# Altium PCB NBP-28 Rev 1.00.PCBDOC (part 3 of 6)
Units mil, origin at the board's own origin, x right, y up, seen from the top; angles counter-clockwise.
Board outline 2716.54 x 3917.15 mil, 8 copper layers (Top Layer, MidLayer3, MidLayer1, VCC, Gnd, VCCINT, MidLayer2, Bottom Layer), stack 59.043 mil thick; 229 components, 429 nets, 1584 pads, 1020 vias.
Unrouted connection lines stored in the file: 302.
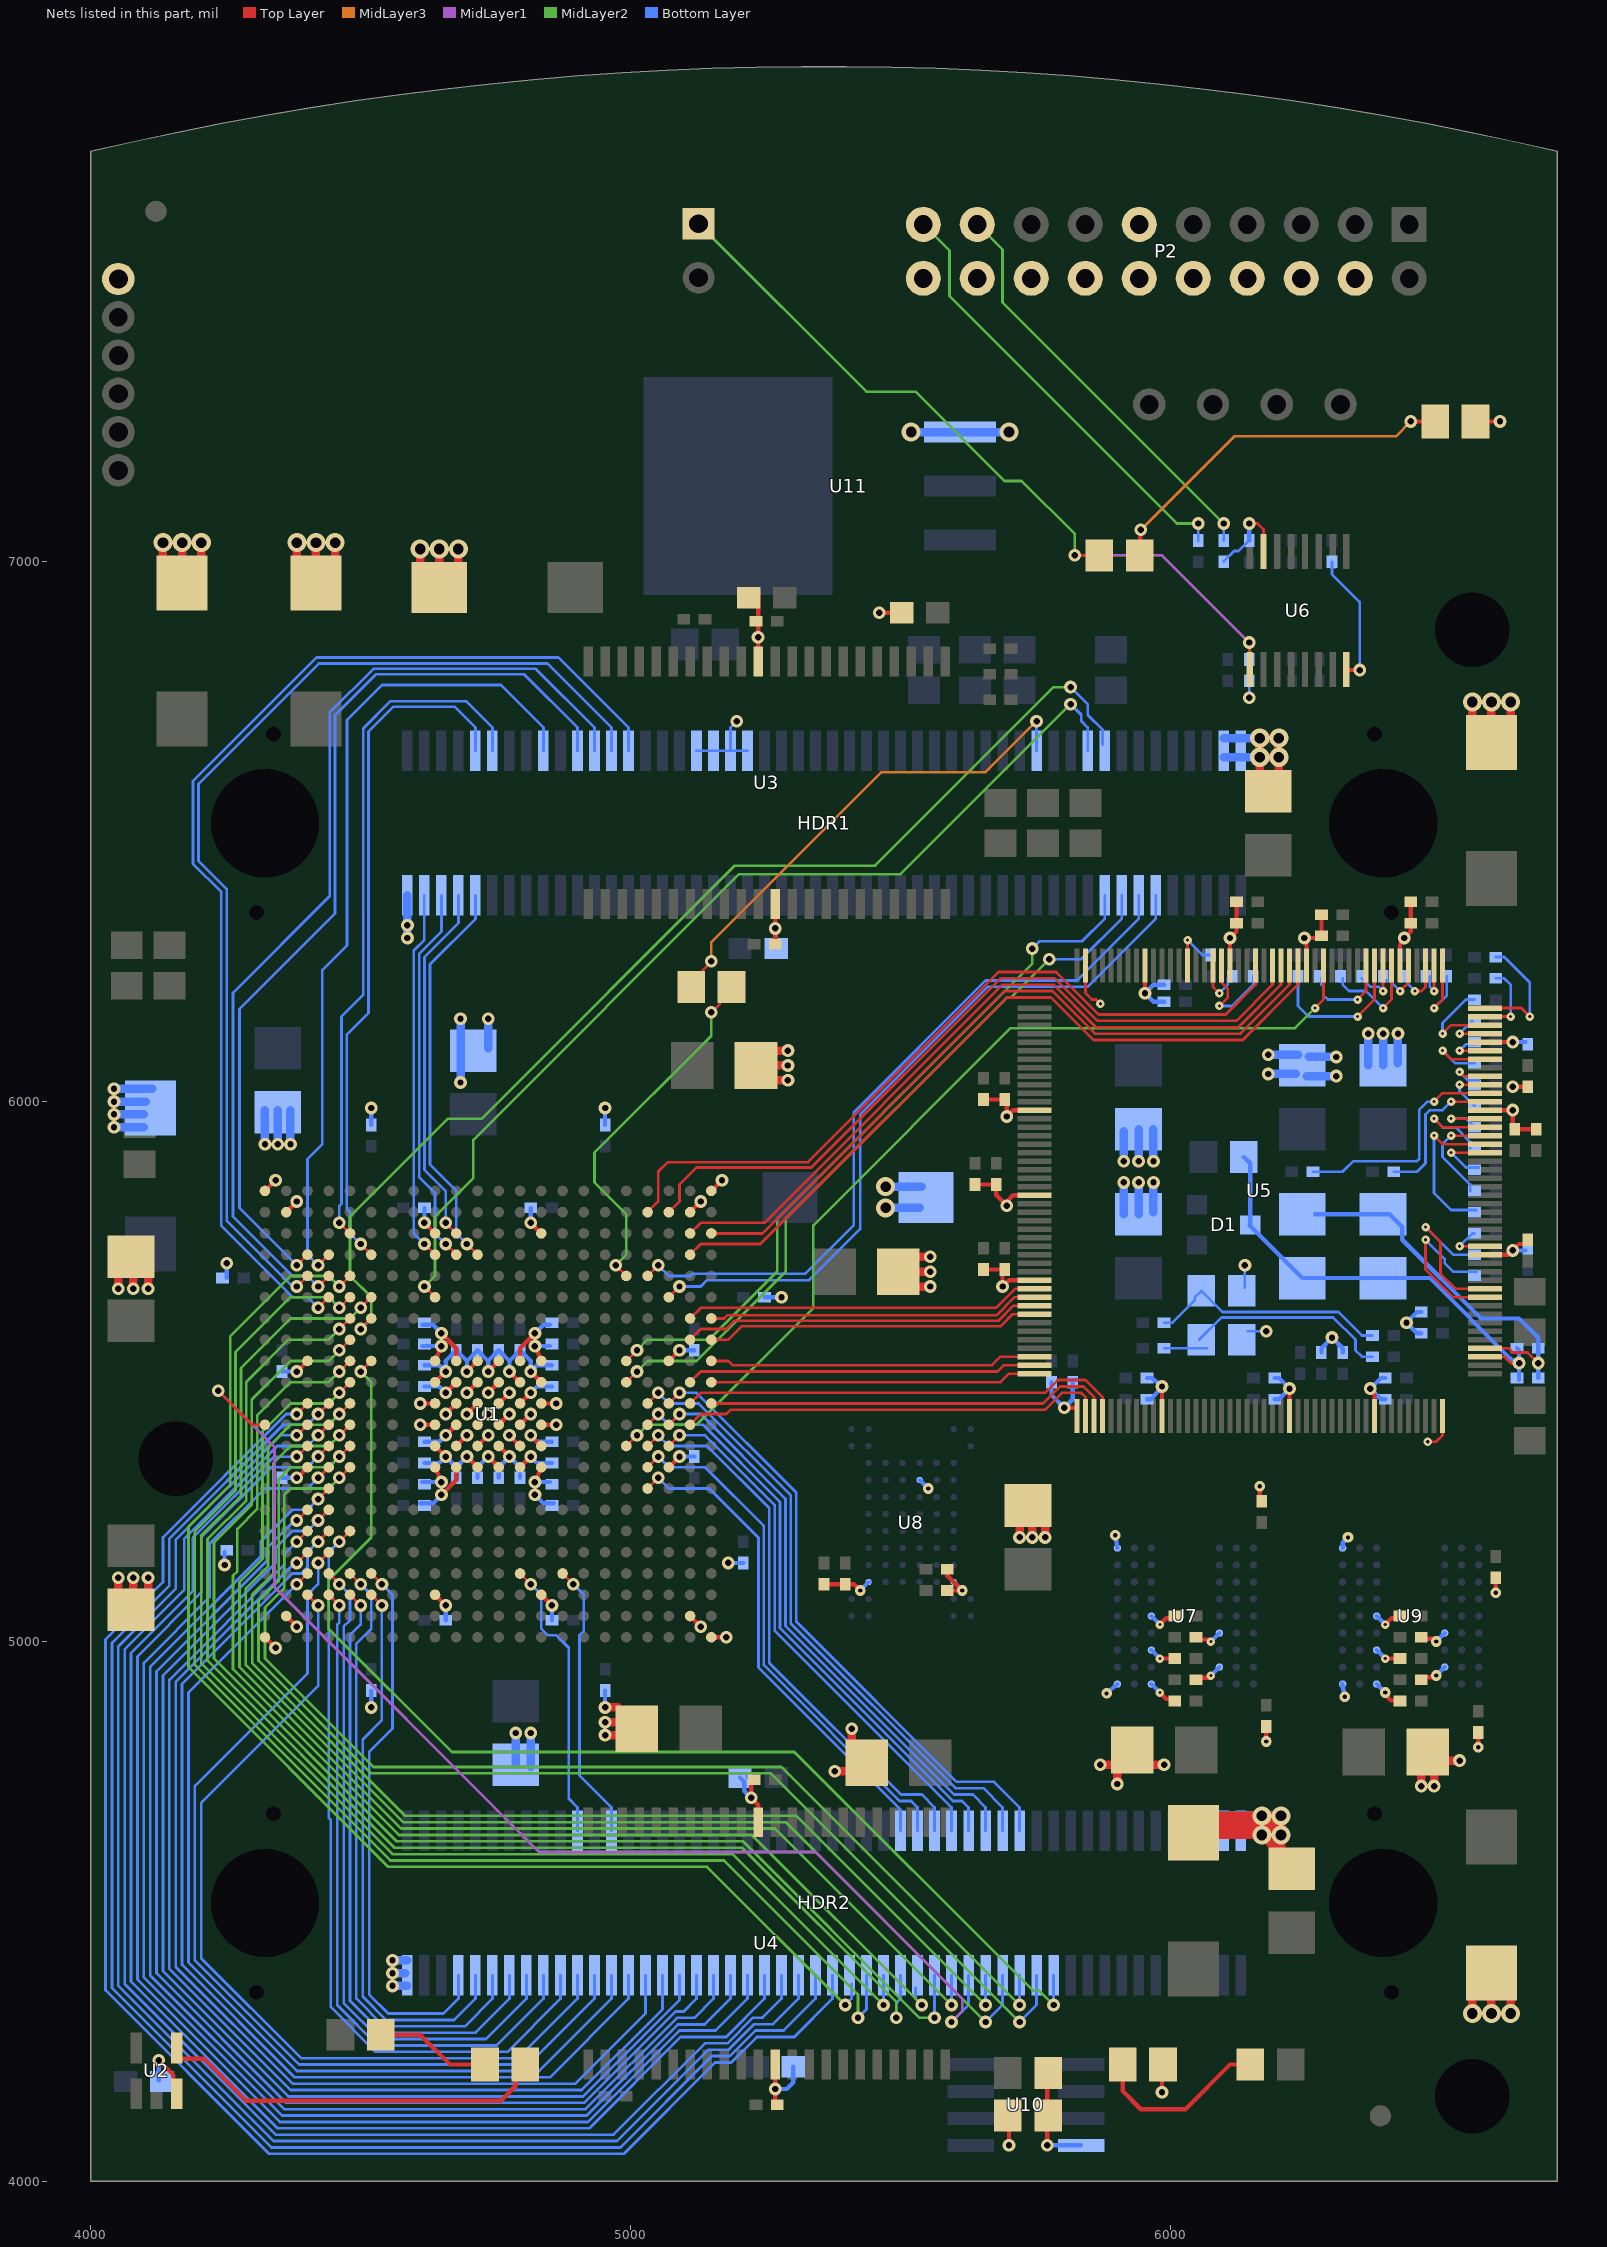
[diagram p9: the nets of this part, all layers, seen from the top]

## Via types
v1: diameter 23.62, hole 11.81, Top Layer to Bottom Layer, 614 vias
v2: diameter 15.75, hole 5.91, Top Layer to Bottom Layer, 214 vias
v3: diameter 78.74, hole 47.24, Top Layer to Bottom Layer, 101 vias
v4: diameter 35.43, hole 19.68, Top Layer to Bottom Layer, 59 vias
v5: diameter 19.68, hole 7.87, Top Layer to Bottom Layer, 32 vias

## Nets (pads, with @x,y where several pads share a name; then routed paths per layer and width w, separated by ;. In a path a pad name is that pad's centre, name@x,y a point inside that pad or via, vN(x,y) a via of type N, cw(c..) or ccw(c..) an arc to the next point about the centre after c; other vN are vias at no path point) (continued)
GND: C1.1 C2.2 C3.2 C4.2 C5.2 C6.2 C7.2 C8.2 C9.2 C10.2 C11.2 C12.2 C13.2 C14.2 C15.2 C16.2 C17.2 C18.2 C19.2 C20.2 C21.2 C22.2 C23.2 C24.2 C25.2 C26.2 C27.2 C28.2 C29.2 C30.2 C31.2 C32.2 C33.2 C34.2 C35.2 C36.2 C37.2 C38.2 C39.2 C40.2 C41.2 C42.2 C43.2 C44.2 C45.2 C46.2 C47.2 C48.2 C49.2 C50.2 C51.2 C52.2 C53.2 C54.2 C55.2 C56.2 C57.2 C58.2 C62.2 C66.2 C67.2 C68.2 C69.2 C70.2 C71.2 C72.2 C73.2 C74.2 C75.2 C76.2 C77.2 C78.2 C79.2 C80.2 C81.2 C82.2 C83.2 C84.2 C85.2 C86.2 C87.2 C88.2 C89.2 C90.2 C91.2 C92.2 C93.2 C94.2 C95.2 C96.2 C97.2 C98.2 C99.2 C100.2 C101.2 C102.2 C103.2 C104.2 C105.2 C106.2 C107.2 C108.2 C109.2 C110.2 C111.2 C112.2 C113.2 C114.2 C115.2 C116.2 C117.2 C118.2 C119.2 C120.2 C121.2 C122.2 C123.2 C124.2 C125.2 C126.2 C127.2 C128.2 C129.2 C130.2 C131.2 C132.2 C133.2 HDR1.1 HDR1.36 HDR1.38 HDR1.40 HDR1.42 HDR1.98 HDR1.100 HDR2.1 HDR2.98 HDR2.100 LED1.2 LED3.2 P2.4 P2.6 P2.8 P2.10 P2.11 P2.12 P2.14 P2.16 P2.18 P2.20 R37.1 R46.1 R60.2 R63.1 R65.2 R66.1 TP10.1 U1.A1 U1.A22 U1.AA2 U1.AA21 U1.AB1 U1.AB22 U1.B2 U1.B21 U1.C9 U1.C14 U1.J3 U1.J9 U1.J10 U1.J11 U1.J12 U1.J13 U1.J14 U1.J20 U1.K9 U1.K10 U1.K11 U1.K12 U1.K13 U1.K14 U1.L9 U1.L10 U1.L11 U1.L12 U1.L13 U1.L14 U1.M9 U1.M10 U1.M11 U1.M12 U1.M13 U1.M14 U1.N9 U1.N10 U1.N11 U1.N12 U1.N13 U1.N14 U1.P3 U1.P9 U1.P10 U1.P11 U1.P12 U1.P13 U1.P14 U1.P20 U1.Y9 U1.Y14 U2.3 U3.12 U3.34 U4.12 U4.34 U5.13 U5.23 U5.33 U5.45 U5.55 U5.70 U5.80 U5.88 U5.103 U5.120 U5.128 U5.138 U5.149 U5.158 U5.168 U5.175 U6.8 U6.15 U7.A1 U7.A3 U7.B7 U7.C3 U7.D7 U7.E3 U7.J1 U8.D4 U8.K2 U8.K7 U9.A1 U9.A3 U9.B7 U9.C3 U9.D7 U9.E3 U9.J1 U11.1 | length 13838.1
  Top Layer w5: U5.175@5842.52,6251.97 5842.52,6200.79 5854.33,6188.98 5862.21,6188.98 v2(5870.08,6181.1) ; v1(6145.67,7070.87) 6161.42,7070.87 6172.25,7060.04 U6.15@6172.25,7018.7 ; v2(6476.38,5370.08) 6492.13,5370.08 6503.94,5381.89 U5.88@6503.94,5417.32
  Top Layer w7.87: v1(4125.99,4224.41) 4153.54,4196.85 U2.3@4153.54,4165.35 ; U1.AB1@4322.84,5007.87 v1(4342.52,4988.19) ; U1.A1@4322.84,5834.65 v1(4342.52,5854.33) ; U1.AA2@4362.21,5047.24 v1(4381.89,5027.56) ; U1.B2@4362.21,5795.28 v1(4381.89,5814.96) ; v1(4381.89,5303.15) U1.P3@4401.58,5322.84 ; v1(4381.89,5500) U1.J3@4401.58,5519.69 ; v1(4610.24,5401.58) U1.M9@4637.8,5401.58 ; v1(4610.24,5440.95) U1.L9@4637.8,5440.95 ; v1(4618.11,5775.59) U1.C9@4637.8,5755.91 ; U1.Y9@4637.8,5086.61 v1(4657.48,5066.93) ; U1.P9@4637.8,5322.84 v1(4649.61,5295.28) ; U1.N9@4637.8,5362.21 v1(4657.48,5342.52) ; U1.K9@4637.8,5480.32 v1(4657.48,5500) ; U1.J9@4637.8,5519.69 v1(4649.61,5547.24) ; v1(4649.61,5271.65) 4677.17,5299.21 U1.P10@4677.17,5322.84 ; v1(4649.61,5570.87) 4677.17,5543.31 U1.J10@4677.17,5519.69 ; v1(4657.48,5381.89) U1.M10@4677.17,5401.58 ; v1(4657.48,5421.26) U1.L10@4677.17,5440.95 ; v1(4657.48,5460.63) U1.K10@4677.17,5480.32 ; U1.N10@4677.17,5362.21 v1(4696.85,5381.89) ; v1(4696.85,5342.52) U1.P11@4716.54,5322.84 ; v1(4696.85,5421.26) U1.L11@4716.54,5440.95 ; v1(4696.85,5460.63) U1.K11@4716.54,5480.32 ; v1(4696.85,5500) U1.J11@4716.54,5519.69 ; U1.N11@4716.54,5362.21 v1(4736.22,5381.89) ; U1.M11@4716.54,5401.58 v1(4736.22,5421.26) ; v1(4736.22,5342.52) U1.P12@4755.91,5322.84 ; v1(4736.22,5460.63) U1.K12@4755.91,5480.32 ; v1(4736.22,5500) U1.J12@4755.91,5519.69 ; U1.N12@4755.91,5362.21 v1(4775.59,5342.52) ; U1.M12@4755.91,5401.58 v1(4775.59,5421.26) ; U1.L12@4755.91,5440.95 v1(4775.59,5460.63) ; v1(4775.59,5381.89) U1.N13@4795.28,5362.21 ; v1(4775.59,5500) U1.K13@4795.28,5480.32 ; U1.P13@4795.28,5322.84 v1(4814.96,5342.52) ; U1.M13@4795.28,5401.58 v1(4814.96,5421.26) ; U1.L13@4795.28,5440.95 v1(4814.96,5460.63) ; U1.J13@4795.28,5519.69 4795.28,5543.31 v1(4822.84,5570.87) ; v1(4814.96,5381.89) U1.N14@4834.65,5362.21 ; v1(4814.96,5500) U1.K14@4834.65,5480.32 ; v1(4814.96,5775.59) U1.C14@4834.65,5755.91 ; v1(4822.84,5295.28) U1.P14@4834.65,5322.84 ; v1(4822.84,5547.24) U1.J14@4834.65,5519.69 ; U1.Y14@4834.65,5086.61 v1(4854.33,5066.93) ; U1.M14@4834.65,5401.58 v1(4862.21,5401.58) ; U1.L14@4834.65,5440.95 v1(4862.21,5440.95) ; U1.P20@5070.87,5322.84 v1(5090.55,5342.52) ; U1.J20@5070.87,5519.69 v1(5090.55,5539.37) ; U1.AA21@5110.24,5047.24 v1(5129.92,5027.56) ; U1.B21@5110.24,5795.28 v1(5129.92,5814.96) ; U1.AB22@5149.61,5007.87 v1(5177.17,5007.87) ; U1.A22@5149.61,5834.65 v1(5169.29,5854.33) ; C57.2@5228.35,4744.1 5223.43,4739.17 v1(5223.43,4710.63) 5236.22,4697.84 U4.34@5236.22,4665.35 ; U3.34@5236.22,6810.04 U3.34@5236.22,6814.96 v1(5236.22,6860.24) 5236.22,6889.76 5236.22,6933.07 C51.2@5236.22,6940.95 ; C58.2@5267.72,4145.67 v1(5267.72,4171.26) U4.12@5267.72,4216.54 U4.12@5267.72,4221.46 ; C53.2@5267.72,6291.34 v1(5267.72,6320.87) U3.12@5267.72,6366.14 U3.12@5267.72,6371.06 ; C105.2@5358.27,5106.3 C104.2@5397.64,5106.3 5413.39,5106.3 v5(5425.2,5094.49) ; v1(5460.63,6905.51) C124.2@5501.97,6905.51 ; C103.2@5586.62,5094.49 v5(5614.17,5094.49) 5586.62,5122.05 C106.2@5586.62,5133.86 ; C71.2@5637.8,5846.46 C81.2@5677.17,5846.46 5677.17,5826.77 v1(5696.85,5807.09) 5696.85,5814.96 5708.66,5826.77 U5.23@5748.03,5826.77 ; C70.2@5653.54,5688.98 C80.2@5692.91,5688.98 ; C68.2@5653.54,6003.94 C78.2@5692.91,6003.94 ; C80.2@5696.85,5685.04 5692.92,5685.04 5688.98,5685.04 v1(5688.98,5657.48) 5700.79,5669.29 U5.33@5748.03,5669.29 ; C78.2@5696.85,6000 v1(5696.85,5972.44) 5708.66,5984.25 U5.13@5748.03,5984.25 ; v1(5700.79,4066.93) R65.2@5700.79,4120.08 ; v1(5803.15,5433.07) U5.45@5826.77,5433.07 ; v1(5952.76,6200.79) U5.168@5952.76,6251.97 ; v2(5980.32,4905.51) 5992.13,4893.7 6007.88,4893.7 C120.2@6011.81,4893.7 ; v2(5980.32,4968.5) C118.2@6007.88,4968.5 ; v2(5980.32,5031.5) 5992.13,5043.31 6007.88,5043.31 C109.2@6011.81,5043.31 ; v1(5984.25,4165.35) LED1.2@5984.25,4214.57 ; U5.55@5984.25,5417.32 v1(5984.25,5472.44) ; C119.2@6043.31,4933.07 6047.25,4933.07 6070.87,4933.07 v2(6074.8,4937.01) ; C121.2@6043.31,5003.94 6047.25,5003.94 6070.87,5003.94 v2(6074.8,5000) ; U5.158@6110.24,6251.97 6110.24,6303.15 6122.05,6314.96 C96.2@6122.05,6330.71 C95.2@6122.05,6370.08 ; C122.2@6165.36,5263.78 v5(6165.36,5287.4) ; v5(6177.17,4814.96) C108.2@6177.17,4842.52 ; U5.70@6220.47,5417.32 v1(6220.47,5468.5) ; v1(6248.03,6303.15) C86.2@6275.59,6303.15 ; U5.149@6251.97,6251.97 v1@6251.97,6299.21 ; C86.2@6279.53,6307.09 C76.2@6279.53,6346.46 ; U6.8@6326.77,6799.21 v1(6350.4,6799.21) ; v1@6370.08,5464.57 6377.95,5456.69 U5.80@6377.95,5417.32 ; v5@6396.65,4902.58 6408.46,4890.76 6425.2,4890.76 C117.2@6428.14,4890.76 ; v2(6397.64,4968.5) C112.2@6425.2,4968.5 ; v2(6397.64,5031.5) 6409.45,5043.31 6425.2,5043.31 C107.2@6429.14,5043.31 ; U5.138@6425.2,6251.97 6425.2,6291.34 v1@6433.07,6299.21 ; v1(6433.07,6303.15) 6444.88,6314.96 C100.2@6444.88,6330.71 C94.2@6444.88,6370.08 ; C115.2@6459.64,4934.07 6464.57,4934.07 6487.2,4934.07 v5@6491.13,4938 ; C116.2@6459.64,5004.94 6464.57,5004.94 6487.2,5004.94 v5@6491.14,5001 ; LED3.2@6564.96,7259.84 v1(6610.24,7259.84) ; v5(6569.88,4804.15) C114.2@6569.88,4831.71 ; U5.103@6582.68,5716.54 6625.99,5716.54 v1(6633.86,5724.41) 6645.67,5736.22 C84.2@6661.42,5736.22 ; U5.120@6582.68,5984.25 v1(6633.86,5984.25) C101.2@6633.86,5952.76 ; U5.128@6582.68,6110.24 v1(6633.86,6110.24) ; v5(6602.36,5090.55) C113.2@6602.36,5118.11 ; v1(6633.86,6027.56) C75.2@6661.42,6027.56 ; C101.2@6637.8,5948.82 C93.2@6677.17,5948.82
  Top Layer w15.75: C3.2@4043.31,5055.12 4051.18,5059.06 v1(4051.18,5118.11) ; C32.2@4043.31,5716.54 4051.18,5712.6 v1(4051.18,5653.54) ; C3.2@4074.8,5055.12 4076.77,5057.09 4078.74,5059.06 v1(4078.74,5118.11) ; C32.2@4074.8,5716.54 4076.77,5714.57 4078.74,5712.6 v1(4078.74,5653.54) ; C3.2@4106.3,5055.12 4106.3,5059.06 v1(4106.3,5118.11) ; v1(4106.3,5653.54) 4106.3,5712.6 C32.2@4106.3,5716.54 ; C130.2@4133.86,6964.57 v4(4133.86,7035.43) ; C130.2@4169.29,6960.63 v4(4169.29,7035.43) ; C130.2@4204.73,6956.69 4204.73,6960.57 v4(4204.73,7035.43) ; C127.2@4381.89,6972.44 v4(4381.89,7035.43) ; C127.2@4417.32,6960.63 v4(4417.32,7035.43) ; C127.2@4452.76,6976.38 v4(4452.76,7035.43) ; C131.2@4610.24,6952.76 v4(4610.24,7023.62) ; C131.2@4645.67,6952.76 v4(4645.67,7023.62) ; C131.2@4681.1,6952.76 v4(4681.1,7023.62) ; v1(4952.76,4826.77) C2.2@5011.81,4826.77 ; v1(4952.76,4850.39) 5011.81,4850.39 C2.2@5015.75,4850.39 ; v1(4952.76,4877.95) 4976.38,4877.95 C2.2@4996.06,4858.27 ; C49.2@5228.35,6039.37 5232.28,6039.37 v1(5291.34,6039.37) ; C49.2@5228.35,6094.49 5232.28,6094.49 v1(5291.34,6094.49) ; C49.2@5232.28,6066.93 v1(5291.34,6066.93) ; v1(5377.95,4759.84) 5437.01,4759.84 C50.2@5440.95,4759.84 ; C50.2@5409.45,4763.78 5409.45,4775.59 v1(5409.45,4838.58) ; C31.2@5492.13,5657.48 5496.06,5657.48 v1(5555.12,5657.48) ; C31.2@5492.13,5712.6 5496.06,5712.6 v1(5555.12,5712.6) ; C31.2@5496.06,5685.04 v1(5555.12,5685.04) ; v1(5720.47,5192.91) C102.2@5720.47,5236.22 ; v1(5744.1,5192.91) C102.2@5744.1,5244.1 ; v1(5767.72,5192.91) C102.2@5767.72,5251.97 ; v1(5870.08,4771.65) C110.2@5901.58,4771.65 ; v1(5901.58,4736.22) C110.2@5901.58,4771.65 ; C110.2@5901.58,4783.47 C110.2@5901.58,4771.65 ; C110.2@5917.32,4771.65 C110.2@5901.58,4771.65 ; C110.2@5937.01,4771.65 v1(5988.19,4771.65) ; C132.2@6043.31,4677.17 v4(6169.29,4677.17) ; C132.2@6047.25,4641.73 v4(6169.29,4641.73) ; C132.2@6070.87,4665.35 v4@6169.29,4665.35 ; C132.2@6078.74,4653.54 v4@6169.29,4653.54 ; C123.2@6165.36,6566.93 6165.36,6574.8 v4(6165.36,6637.8) ; C123.2@6200.79,6566.93 6200.79,6574.8 v4(6200.79,6637.8) ; C125.2@6204.73,4582.68 C125.2@6204.73,4606.3 ; C125.2@6208.66,4602.36 C125.2@6204.73,4606.3 ; v1(6464.57,4732.28) C111.2@6464.57,4795.28 ; v1(6488.19,4732.28) C111.2@6488.19,4787.4 ; C111.2@6492.13,4779.53 v1(6535.43,4779.53) ; v4(6559.06,4311.02) C126.2@6559.06,4374.02 ; C133.2@6559.06,6677.17 v4(6559.06,6740.16) ; v4(6594.49,4311.02) C126.2@6594.49,4377.95 ; C133.2@6594.49,6665.35 v4(6594.49,6740.16) ; v4(6629.92,4311.02) C126.2@6629.92,4362.21 ; C133.2@6629.92,6661.42 6629.92,6665.29 v4(6629.92,6740.16) ; v4(6165.36,6637.8) v4(6200.79,6637.8) ; v4(6165.36,6637.8) v4(6165.36,6673.23) v4(6200.79,6673.23) v4(6200.79,6637.8) ; v4(6169.29,4641.73) 6187.01,4624.02 C125.2@6204.73,4606.3 ; v4(6169.29,4641.73) v4(6204.73,4641.73) ; v4(6169.29,4641.73) v4@6169.29,4653.54 ; v4@6169.29,4653.54 6192.91,4653.54 v4(6204.73,4641.73) ; v4@6169.29,4653.54 v4@6169.29,4665.35 ; v4@6169.29,4665.35 6192.91,4665.35 v4(6204.73,4677.17) ; v4@6169.29,4665.35 v4(6169.29,4677.17) ; v4(6169.29,4677.17) v4(6204.73,4677.17) ; C125.2@6204.73,4606.3 v4(6204.73,4641.73) ; v4(6204.73,4641.73) v4(6204.73,4677.17)
  Bottom Layer w5: HDR1.36@5122.05,6649.61 HDR1.38@5153.54,6649.61 HDR1.40@5185.04,6649.61 ; v1(5196.85,6704.72) 5185.04,6692.91 HDR1.40@5185.04,6649.61 ; HDR1.42@5216.54,6649.61 HDR1.40@5185.04,6649.61 ; R66.1@6098.43,7000 6118.11,7019.69 6125.99,7019.69 C62.2@6145.67,7039.37 ; R37.1@6137.8,5655.51 v1(6137.8,5696.85) ; R46.1@6143.7,5574.8 v1(6177.17,5574.8) ; v1(6145.67,6748.03) R60.2@6145.67,6779.53 ; R63.1@6299.21,7000 6299.21,6976.38 6350.4,6925.2 v1(6350.4,6799.21)
  Bottom Layer w7.87: C1.1@4125.99,4187.01 v1(4125.99,4224.41) ; v1(4248.03,5141.73) C11.2@4248.03,5165.35 ; C9.2@4251.97,5673.23 v1(4251.97,5700.79) ; C15.2@4354.33,5303.15 v1(4381.89,5303.15) ; C47.2@4354.33,5500 v1(4381.89,5500) ; v1(4519.69,4877.95) C10.2@4519.69,4909.45 ; C4.2@4519.69,5956.69 v1(4519.69,5988.19) ; C24.2@4610.24,5255.91 4618.11,5255.91 4633.86,5255.91 v1(4649.61,5271.65) ; C20.2@4614.17,5295.28 4618.11,5295.28 v1(4649.61,5295.28) ; C21.2@4614.17,5547.24 4618.11,5547.24 v1(4649.61,5547.24) ; C22.2@4614.17,5586.61 4618.11,5586.61 4633.86,5586.61 v1(4649.61,5570.87) ; C25.2@4618.11,5330.71 4645.67,5330.71 v1(4657.48,5342.52) 4677.17,5322.84 ; C33.2@4618.11,5370.08 4645.67,5370.08 v1(4657.48,5381.89) ; C40.2@4618.11,5472.44 4645.67,5472.44 v1(4657.48,5460.63) ; C23.2@4618.11,5511.81 4645.67,5511.81 v1(4657.48,5500) 4657.48,5519.69 C39.2@4677.17,5539.37 4696.85,5519.69 ; v1(4618.11,5775.59) C14.2@4618.11,5803.15 ; C48.2@4657.48,5039.37 v1(4657.48,5066.93) ; C36.2@4677.17,5303.15 4677.17,5322.84 ; v1(4696.85,5500) 4696.85,5519.69 ; C44.2@4716.54,5303.15 4716.54,5322.84 ; v1(4736.22,5500) 4736.22,5519.69 ; C34.2@4755.91,5303.15 4755.91,5322.84 ; v1(4775.59,5500) 4775.59,5519.69 ; C43.2@4795.28,5303.15 4795.28,5322.84 ; v1(4814.96,5381.89) 4826.77,5370.08 C38.2@4854.33,5370.08 ; v1(4814.96,5460.63) 4826.77,5472.44 C42.2@4854.33,5472.44 ; v1(4814.96,5775.59) C46.2@4814.96,5803.15 ; v1(4822.84,5271.65) 4838.58,5255.91 4854.33,5255.91 C26.2@4858.27,5255.91 ; v1(4822.84,5295.28) C18.2@4850.4,5295.28 ; v1(4822.84,5547.24) C19.2@4850.4,5547.24 ; v1(4822.84,5570.87) 4838.58,5586.61 C28.2@4850.4,5586.61 ; C13.2@4854.33,5039.37 v1(4854.33,5066.93) ; C27.2@4854.33,5330.71 4826.77,5330.71 v1(4814.96,5342.52) 4795.28,5322.84 ; C29.2@4854.33,5511.81 4826.77,5511.81 v1(4814.96,5500) 4814.96,5519.69 C35.2@4795.28,5539.37 4775.59,5519.69 ; v1(4952.76,4877.95) C5.2@4952.76,4909.45 ; C8.2@4952.76,5956.69 v1(4952.76,5988.19) ; v1(5090.55,5342.52) C45.2@5118.11,5342.52 ; v1(5090.55,5539.37) C12.2@5118.11,5539.37 ; v1(5181.1,5145.67) C7.2@5208.66,5145.67 ; C56.2@5202.76,4748.03 5210.63,4740.16 5210.63,4723.43 v1(5223.43,4710.63) ; C56.2@5216.54,4748.03 C56.2@5216.54,4751.97 ; C6.2@5248.03,5637.8 v1(5279.53,5637.8) ; v1(5267.72,4171.26) 5289.37,4171.26 5301.18,4183.07 C55.2@5301.18,4212.6 ; C52.2@5267.72,6285.43 v1(5267.72,6320.87) ; v5(5425.2,5094.49) U8.K7@5440.95,5110.24 ; U8.D4@5535.43,5299.21 v5(5551.18,5283.47) ; U8.K2@5598.43,5110.24 v5(5614.17,5094.49) ; C97.2@5779.53,5480.32 5779.53,5456.69 v1(5803.15,5433.07) 5818.9,5448.82 C92.2@5818.9,5480.32 ; v5(5881.68,4903.88) U7.A1@5901.58,4921.26 ; v5(5897.64,5196.85) U7.J1@5901.58,5173.23 ; C79.2@5956.69,5448.82 5964.57,5448.82 v1(5984.25,5472.44) 5964.57,5488.19 C69.2@5956.69,5488.19 ; U7.A3@5964.57,4921.26 v2(5980.32,4905.51) ; U7.C3@5964.57,4984.25 v2(5980.32,4968.5) ; U7.E3@5964.57,5047.24 v2(5980.32,5031.5) ; C87.2@5988.19,6185.04 5968.51,6185.04 v1(5952.76,6200.79) 5968.51,6216.54 C77.2@5988.19,6216.54 ; v2(6074.8,4937.01) U7.B7@6090.55,4952.76 ; v2(6074.8,5000) U7.D7@6090.55,5015.75 ; C62.2@6145.67,7039.37 v1(6145.67,7070.87) ; C83.2@6192.91,5448.82 6200.79,5448.82 v1(6220.47,5468.5) 6200.79,5488.19 C73.2@6192.91,5488.19 ; C98.2@6279.53,5535.43 6279.53,5543.31 v1(6299.21,5562.99) 6318.9,5543.31 C91.2@6318.9,5535.43 ; U9.A1@6317.91,4922.26 6317.91,4921.26 6317.95,4921.06 v5(6322.84,4897.64) ; U9.J1@6318.9,5173.23 6318.9,5183.07 v5(6328.74,5192.91) ; U9.A3@6381.89,4921.26 v5(6397.64,4905.51) ; U9.C3@6381.89,4984.25 v2(6397.64,4968.5) ; U9.E3@6381.89,5047.24 v2(6397.64,5031.5) ; C82.2@6397.64,5448.82 6389.77,5448.82 v1(6370.08,5468.5) 6389.77,5488.19 C72.2@6397.64,5488.19 ; C99.2@6464.57,5570.87 6456.69,5570.87 v1(6437.01,5590.55) 6456.69,5610.24 C90.2@6464.57,5610.24 ; v5(6492.13,4937.01) U9.B7@6507.88,4952.76 ; v5(6492.13,5000) U9.D7@6507.88,5015.75 ; v1(6633.86,5724.41) C74.2@6657.48,5724.41 ; v1(6633.86,6110.24) C85.2@6657.48,6110.24 ; 4677.17,5322.84 v1(4696.85,5342.52) 4716.54,5322.84 ; 4696.85,5519.69 C41.2@4716.54,5539.37 4736.22,5519.69 ; 4716.54,5322.84 v1(4736.22,5342.52) 4755.91,5322.84 ; 4736.22,5519.69 C37.2@4755.91,5539.37 4775.59,5519.69 ; 4755.91,5322.84 v1(4775.59,5342.52) 4795.28,5322.84
  Bottom Layer w15.75: v1(4043.31,5952.76) C128.2@4098.43,5952.76 ; v1(4043.31,5976.38) C128.2@4098.43,5976.38 ; v1(4043.31,6000) C128.2@4102.36,6000 ; v1(4043.31,6023.62) 4110.53,6023.62 C128.2@4114.17,6023.62 ; v1(4322.84,5921.26) 4322.84,5980.32 C30.2@4322.84,5984.25 ; v1(4346.46,5921.26) C30.2@4346.46,5980.32 C30.2@4346.46,5984.25 ; v1(4370.08,5921.26) 4370.08,5980.32 C30.2@4370.08,5984.25 ; v1(4559.06,4362.21) HDR2.1@4586.62,4362.21 ; v1(4559.06,4385.83) HDR2.1@4582.68,4385.83 ; v1(4559.06,4409.45) HDR2.1@4586.62,4409.45 ; v1(4586.62,6303.15) v1(4586.62,6326.77) HDR1.1@4586.61,6381.89 ; v1(4685.04,6035.43) 4685.04,6094.49 v1(4685.04,6153.54) ; C17.2@4736.22,6098.43 v1(4736.22,6153.54) ; C16.2@4787.4,4771.65 v1(4787.4,4830.71) ; C16.2@4814.96,4767.72 4814.96,4771.65 v1(4814.96,4830.71) ; v4(5472.44,5803.15) C129.2@5535.43,5803.15 ; v4(5472.44,5842.52) C129.2@5539.37,5842.52 ; v4(5519.69,7240.16) U11.1@5610.24,7240.16 v4(5700.79,7240.16) ; C88.2@5913.39,5791.34 v1(5913.39,5850.39) ; v1(5913.39,5889.76) C67.2@5913.39,5944.88 ; C88.2@5940.95,5791.34 v1(5940.95,5850.39) ; v1(5940.95,5889.76) C67.2@5940.95,5948.82 ; C88.2@5968.51,5795.28 v1(5968.51,5850.39) ; v1(5968.51,5889.76) C67.2@5968.51,5948.82 ; HDR2.98@6098.43,4641.73 6129.92,4641.73 v4(6169.29,4641.73) v4(6204.73,4641.73) ; HDR2.98@6098.43,4677.17 6129.92,4677.17 v4(6169.29,4677.17) v4(6204.73,4677.17) ; HDR1.98@6098.43,6637.8 6129.92,6637.8 v4(6165.36,6637.8) ; HDR1.98@6098.43,6673.23 6129.92,6673.23 v4(6165.36,6673.23) ; v1(6181.1,6051.18) C89.2@6232.28,6051.18 ; v1(6181.1,6086.61) C89.2@6236.22,6086.61 ; C89.2@6251.97,6047.24 v1(6307.09,6047.24) ; C89.2@6255.91,6082.68 v1(6307.09,6082.68) ; C66.2@6366.14,6066.93 v1(6366.14,6125.98) ; C66.2@6393.7,6066.93 v1(6393.7,6125.98) ; C66.2@6421.26,6070.87 v1(6421.26,6125.98) ; v4(6165.36,6637.8) v4(6200.79,6637.8) v4(6200.79,6673.23) v4(6165.36,6673.23) ; v4(6165.36,6637.8) v4(6165.36,6673.23)
  other v1: 6110.24,6303.15
GREEN0: HDR1.10 U1.D6 | length 1280.7
  Top Layer w5: v1(4500,5736.22) U1.D6@4519.69,5716.54
  Bottom Layer w5: v1(4500,5736.22) 4480.32,5755.91 4480.32,5795.28 4474.57,5801.02 4474.57,6124.17 4514.62,6164.22 4514.62,6685.61 4560.62,6731.61 4673.9,6731.61 4712.6,6692.91 HDR1.10@4712.6,6649.61
GREEN1: HDR1.12 U1.C5 | length 1285.2
  Top Layer w5: v1(4460.63,5775.59) U1.C5@4480.32,5755.91
  Bottom Layer w5: v1(4460.63,5775.59) 4460.63,5807.09 4464.57,5811.02 4464.57,6157.48 4504.62,6197.53 4504.62,6690.61 4555.62,6741.61 4695.4,6741.61 4744.09,6692.91 HDR1.12@4744.09,6649.61
HDRIVE: HDR1.18 U1.D4 | length 1542.8
  Top Layer w5: v1(4421.26,5696.85) U1.D4@4440.95,5716.54
  Bottom Layer w5: v1(4421.26,5696.85) 4401.58,5716.54 4401.58,5893.7 4429.14,5921.26 4429.14,6244.09 4474.62,6289.58 4474.62,6706.61 4539.62,6771.61 4759.89,6771.61 4838.58,6692.91 HDR1.18@4838.58,6649.61
INT0: U1.B19 U5.155 | length 1433.4
  Top Layer w5: U1.B19@5031.5,5795.28 5051.18,5814.96 5051.18,5870.08 5069.06,5887.95 5328.9,5887.95 5681.1,6240.16 5788.13,6240.16 5866.87,6161.42 6102.36,6161.42 6157.48,6216.54 U5.155@6157.48,6251.97
INT1: U1.B20 U5.153 | length 1411.7
  Top Layer w5: U1.B20@5070.87,5795.28 5090.55,5814.96 5090.55,5846.46 5122.05,5877.95 5334.65,5877.95 5685.04,6228.35 5785.8,6228.35 5864.54,6149.61 6122.05,6149.61 6188.98,6216.54 U5.153@6188.98,6251.97
INT2: U1.C21 U5.152 | length 1386
  Top Layer w5: U1.C21@5110.24,5755.91 5129.92,5775.59 5248.03,5775.59 5688.98,6216.54 5783.47,6216.54 5862.21,6137.8 6125.99,6137.8 6204.73,6216.54 U5.152@6204.73,6251.97
INT3: U1.C22 U5.151 | length 1362.3
  Top Layer w5: U1.C22@5149.61,5755.91 5244.1,5755.91 5692.91,6204.72 5781.13,6204.72 5859.88,6125.98 6129.92,6125.98 6220.47,6216.54 U5.151@6220.47,6251.97
INT4: U1.D21 U5.150 | length 1433.8
  Top Layer w5: U1.D21@5110.24,5716.54 5129.92,5736.22 5240.16,5736.22 5696.85,6192.91 5778.8,6192.91 5857.54,6114.17 6133.86,6114.17 6236.22,6216.54 U5.150@6236.22,6251.97
IO0: HDR2.7 U1.W6 | length 1048.5
  Top Layer w5: U1.W6@4519.69,5125.98 v1(4539.37,5106.3)
  Bottom Layer w5: v1(4539.37,5106.3) 4559.06,5086.61 4559.06,4838.58 4515.75,4795.28 4515.75,4346.46 4551.18,4311.02 4653.54,4311.02 4681.1,4338.58 HDR2.7@4681.1,4381.89
IO1: HDR2.9 U1.Y6 | length 1053.1
  Top Layer w5: U1.Y6@4519.69,5086.61 v1(4539.37,5066.93)
  Bottom Layer w5: v1(4539.37,5066.93) 4539.37,4854.33 4503.94,4818.9 4503.94,4342.52 4547.25,4299.21 4673.23,4299.21 4712.6,4338.58 HDR2.9@4712.6,4381.89
IO2: HDR2.11 U1.W5 | length 1152.8
  Top Layer w5: U1.W5@4480.32,5125.98 v1(4500,5106.3)
  Bottom Layer w5: v1(4500,5106.3) 4519.69,5086.61 4519.69,5023.62 4492.13,4996.06 4492.13,4338.58 4543.31,4287.4 4692.91,4287.4 4744.1,4338.58 HDR2.11@4744.1,4381.89
IO3: HDR2.13 U1.Y5 | length 1157.4
  Top Layer w5: U1.Y5@4480.32,5086.61 v1(4500,5066.93)
  Bottom Layer w5: v1(4500,5066.93) 4500,5031.5 4480.32,5011.81 4480.32,4334.65 4539.37,4275.59 4712.6,4275.59 4775.59,4338.58 HDR2.13@4775.59,4381.89
IO4: HDR2.15 U1.W4 | length 1257.1
  Top Layer w5: U1.W4@4440.95,5125.98 v1(4460.63,5106.3)
  Bottom Layer w5: v1(4460.63,5106.3) 4480.32,5086.61 4480.32,5039.37 4468.51,5027.56 4468.51,4330.71 4535.43,4263.78 4732.28,4263.78 4807.09,4338.58 HDR2.15@4807.09,4381.89
IO5: HDR2.17 U1.Y4 | length 1261.7
  Top Layer w5: U1.Y4@4440.95,5086.61 v1(4460.63,5066.93)
  Bottom Layer w5: v1(4460.63,5066.93) 4460.63,5035.43 4456.69,5031.5 4456.69,4326.77 4531.5,4251.97 4751.97,4251.97 4838.58,4338.58 HDR2.17@4838.58,4381.89
IO6: HDR2.19 U1.U5 | length 1443.3
  Top Layer w5: v1(4460.63,5185.04) U1.U5@4480.32,5204.72
  Bottom Layer w5: v1(4460.63,5185.04) 4440.95,5165.35 4440.95,4673.23 4444.88,4669.29 4444.88,4322.84 4527.56,4240.16 4771.65,4240.16 4870.08,4338.58 HDR2.19@4870.08,4381.89
IO7: HDR2.21 U1.Y3 | length 1633.5
  Top Layer w5: U1.Y3@4401.58,5086.61 v1(4421.26,5066.93)
  Bottom Layer w5: v1(4421.26,5066.93) 4421.26,4917.32 4204.73,4700.79 4204.73,4413.39 4389.77,4228.35 4791.34,4228.35 4901.58,4338.58 HDR2.21@4901.58,4381.89
IO8: HDR2.23 U1.V4 | length 1772.6
  Top Layer w5: v1(4421.26,5145.67) U1.V4@4440.95,5165.35
  Bottom Layer w5: v1(4421.26,5145.67) 4421.26,5106.3 4401.58,5086.61 4401.58,4940.95 4192.91,4732.28 4192.91,4409.45 4385.83,4216.54 4811.02,4216.54 4933.07,4338.58 HDR2.23@4933.07,4381.89
IO9: HDR2.25 U1.W3 | length 1777.2
  Top Layer w5: v1(4381.89,5106.3) U1.W3@4401.58,5125.98
  Bottom Layer w5: v1(4381.89,5106.3) 4322.84,5047.24 4181.1,4905.51 4181.1,4405.51 4381.89,4204.72 4830.71,4204.72 4964.57,4338.58 HDR2.25@4964.57,4381.89
IO10: HDR2.27 U1.U4 | length 1941.7
  Top Layer w5: v1(4421.26,5185.04) U1.U4@4440.95,5204.72
  Bottom Layer w5: v1(4421.26,5185.04) 4401.58,5165.35 4401.58,5137.8 4389.77,5125.98 4374.02,5125.98 4169.29,4921.26 4169.29,4401.58 4377.95,4192.91 4850.39,4192.91 4996.06,4338.58 HDR2.27@4996.06,4381.89
IO11: HDR2.29 U1.V3 | length 1955.6
  Top Layer w5: v1(4381.89,5145.67) U1.V3@4401.58,5165.35
  Bottom Layer w5: v1(4381.89,5145.67) 4377.95,5145.67 4157.48,4925.2 4157.48,4397.64 4374.02,4181.1 4897.64,4181.1 5027.56,4311.02 HDR2.29@5027.56,4381.89
IO12: HDR2.31 U1.U3 | length 2048.3
  Top Layer w5: v1(4381.89,5185.04) U1.U3@4401.58,5204.72
  Bottom Layer w5: v1(4381.89,5185.04) 4358.27,5161.42 4358.27,5141.73 4145.67,4929.13 4145.67,4393.7 4370.08,4169.29 4909.45,4169.29 5059.06,4318.9 HDR2.31@5059.06,4381.89
IO13: HDR2.33 U1.T4 | length 2170.3
  Top Layer w5: v1(4421.26,5224.41) U1.T4@4440.95,5244.09
  Bottom Layer w5: v1(4421.26,5224.41) 4401.58,5204.72 4374.02,5204.72 4342.52,5173.23 4342.52,5145.67 4133.86,4937.01 4133.86,4389.76 4366.14,4157.48 4911.78,4157.48 5090.55,4336.25 HDR2.33@5090.55,4381.89
IO14: HDR2.35 U1.T3 | length 2199.1
  Top Layer w5: v1(4381.89,5224.41) U1.T3@4401.58,5244.09
  Bottom Layer w5: v1(4381.89,5224.41) 4377.95,5224.41 4326.77,5173.23 4326.77,5149.61 4122.05,4944.88 4122.05,4385.83 4362.21,4145.67 4914.11,4145.67 5083.4,4314.96 5098.43,4314.96 5122.05,4338.58 HDR2.35@5122.05,4381.89
IO15: HDR2.37 U1.R4 | length 2328.9
  Top Layer w5: v1(4421.26,5263.78) U1.R4@4440.95,5283.47
  Bottom Layer w5: v1(4421.26,5263.78) 4401.58,5244.1 4374.02,5244.1 4314.96,5185.04 4314.96,5157.48 4110.24,4952.76 4110.24,4381.89 4358.27,4133.86 4916.44,4133.86 5085.74,4303.15 5118.11,4303.15 5153.55,4338.58 HDR2.37@5153.55,4381.89
IO16: HDR2.39 U1.P4 | length 2458.5
  Top Layer w5: v1(4421.26,5303.15) U1.P4@4440.95,5322.84
  Bottom Layer w5: v1(4421.26,5303.15) 4401.58,5283.47 4322.84,5283.47 4220.47,5181.1 4220.47,5082.68 4098.43,4960.63 4098.43,4377.95 4354.33,4122.05 4918.77,4122.05 5087.46,4290.74 5137.19,4290.74 5185.04,4338.58 HDR2.39@5185.04,4381.89
IO17: HDR2.41 U1.N4 | length 2551.3
  Top Layer w5: v1(4421.26,5342.52) U1.N4@4440.95,5362.21
  Bottom Layer w5: v1(4421.26,5342.52) 4401.58,5322.84 4334.49,5322.84 4204.73,5193.07 4204.73,5090.55 4086.62,4972.44 4086.62,4374.02 4350.4,4110.24 4921.11,4110.24 5090.4,4279.53 5157.48,4279.53 5216.54,4338.58 HDR2.41@5216.54,4381.89
IO18: HDR2.43 U1.N3 | length 2580.5
  Top Layer w5: v1(4381.89,5342.52) U1.N3@4401.58,5362.21
  Bottom Layer w5: v1(4381.89,5342.52) 4340.03,5342.52 4188.98,5191.46 4188.98,5092.88 4074.8,4978.71 4074.8,4370.08 4346.46,4098.43 4923.44,4098.43 5092.73,4267.72 5177.17,4267.72 5248.03,4338.58 HDR2.43@5248.03,4381.89
IO19: HDR2.45 U1.M4 | length 2704.8
  Top Layer w5: v1(4421.26,5381.89) U1.M4@4440.95,5401.58
  Bottom Layer w5: v1(4421.26,5381.89) 4401.58,5362.21 4345.58,5362.21 4173.23,5189.86 4173.23,5095.21 4062.99,4984.98 4062.99,4366.14 4342.52,4086.61 4968.51,4086.61 5137.8,4255.91 5179.5,4255.91 5226.85,4303.26 5244.21,4303.26 5279.53,4338.58 HDR2.45@5279.53,4381.89
IO20: HDR2.47 U1.M3 | length 2734
  Top Layer w5: v1(4381.89,5381.89) U1.M3@4401.58,5401.58
  Bottom Layer w5: v1(4381.89,5381.89) 4351.12,5381.89 4157.48,5188.25 4157.48,5097.55 4051.18,4991.25 4051.18,4362.21 4338.58,4074.8 4974.77,4074.8 5144.06,4244.1 5181.83,4244.1 5229.07,4291.34 5263.78,4291.34 5311.03,4338.58 HDR2.47@5311.03,4381.89
IO21: HDR2.49 U1.L4 | length 2858.2
  Top Layer w5: v1(4421.26,5421.26) U1.L4@4440.95,5440.95
  Bottom Layer w5: v1(4421.26,5421.26) 4401.58,5401.58 4356.66,5401.58 4145.67,5190.58 4145.67,5103.81 4039.37,4997.51 4039.37,4358.27 4334.65,4062.99 4981.04,4062.99 5150.33,4232.28 5184.16,4232.28 5231.41,4279.53 5283.47,4279.53 5342.52,4338.58 HDR2.49@5342.52,4381.89
IO22: HDR2.51 U1.L3 | length 2887.4
  Top Layer w5: v1(4381.89,5421.26) U1.L3@4401.58,5440.95
  Bottom Layer w5: v1(4381.89,5421.26) 4362.21,5421.26 4133.86,5192.91 4133.86,5110.08 4027.56,5003.78 4027.56,4354.33 4330.71,4051.18 4987.31,4051.18 5156.6,4220.47 5186.49,4220.47 5233.74,4267.72 5303.15,4267.72 5374.02,4338.58 HDR2.51@5374.02,4381.89
IO23: HDR2.53 U1.E5 | length 2449.3
  Top Layer w5: v1(4460.63,5657.48) U1.E5@4480.32,5677.17
  MidLayer2 w5: v1(4460.63,5657.48) 4440.95,5677.17 4370.08,5677.17 4258.27,5565.35 4258.27,5289.76 4181.1,5212.6 4181.1,4952.76 4551.18,4582.68 5141.73,4582.68 v1(5397.64,4326.77)
  Bottom Layer w5: v1(5397.64,4326.77) 5409.45,4338.58 HDR2.53@5409.45,4366.14
IO24: HDR2.55 U1.F5 | length 2490.7
  Top Layer w5: v1(4460.63,5618.11) U1.F5@4480.32,5637.8
  MidLayer2 w5: v1(4460.63,5618.11) 4440.95,5637.8 4370.08,5637.8 4268.27,5535.98 4268.27,5280.08 4192.91,5204.73 4192.91,4956.69 4555.12,4594.49 5173.23,4594.49 5421.26,4346.46 v1(5421.26,4303.15)
  Bottom Layer w5: v1(5421.26,4303.15) 5437.01,4318.9 HDR2.55@5437.01,4381.89
IO25: HDR2.57 U1.F6 | length 2453.7
  Top Layer w5: v1(4500,5618.11) U1.F6@4519.69,5637.8
  MidLayer2 w5: v1(4500,5618.11) 4480.32,5598.43 4370.08,5598.43 4278.27,5506.61 4278.27,5269.51 4204.73,5195.97 4204.73,4960.63 4559.06,4606.3 5188.98,4606.3 v1(5468.51,4326.77)
  Bottom Layer w5: v1(5468.51,4326.77) HDR2.57@5468.51,4381.89
IO26: HDR2.59 U1.G5 | length 2435.6
  Top Layer w5: v1(4460.63,5578.74) U1.G5@4480.32,5598.43
  MidLayer2 w5: v1(4460.63,5578.74) 4440.95,5559.06 4366.14,5559.06 4288.27,5481.18 4288.27,5261.43 4216.54,5189.7 4216.54,4964.57 4562.99,4618.11 5206.33,4618.11 5492.13,4332.31 v1(5492.13,4303.15)
  Bottom Layer w5: v1(5492.13,4303.15) 5492.13,4330.71 5500,4338.58 HDR2.59@5500,4381.89
IO27: HDR2.61 U1.J5 | length 2271.7
  Top Layer w5: v1(4460.63,5500) U1.J5@4480.32,5519.69
  MidLayer2 w5: v1(4460.63,5500) 4440.95,5480.32 4370.08,5480.32 4308.27,5418.5 4308.27,5245.28 4271.65,5208.66 4271.65,5129.92 4263.78,5122.05 4263.78,4948.82 4570.87,4641.73 5224.41,4641.73 v1(5539.37,4326.77)
  Bottom Layer w5: HDR2.61@5527.56,4358.27 5527.56,4338.58 v1(5539.37,4326.77)
IO28: HDR2.63 U1.H5 | length 2425.4
  Top Layer w5: v1(4460.63,5539.37) U1.H5@4480.32,5559.06
  MidLayer2 w5: v1(4460.63,5539.37) 4440.95,5519.69 4370.08,5519.69 4298.27,5447.87 4298.27,5253.36 4228.35,5183.43 4228.35,4968.5 4566.93,4629.92 5208.66,4629.92 5535.43,4303.15 v1(5562.99,4303.15)
  Bottom Layer w5: v1(5562.99,4303.15) HDR2.63@5562.99,4381.89
IO29: HDR2.65 U1.K5 | length 2275.4
  Top Layer w5: v1(4460.63,5460.63) U1.K5@4480.32,5480.32
  MidLayer2 w5: v1(4460.63,5460.63) 4440.95,5440.95 4370.08,5440.95 4318.27,5389.13 4318.27,5152.91 4275.59,5110.24 4275.59,4952.76 4574.8,4653.54 5267.72,4653.54 v1(5594.49,4326.77)
  Bottom Layer w5: v1@5594.49,4338.58 HDR2.65@5594.49,4381.89
IO30: HDR2.67 U1.M1 | length 2260.4
  Top Layer w5: v1(4236.22,5464.57) 4299.21,5401.58 U1.M1@4322.84,5401.58
  MidLayer1 w5: v1(4236.22,5464.57) 4340.4,5360.39 4340.4,5100.55 4830.71,4610.24 5342.52,4610.24 5614.17,4338.58 5614.17,4314.96 v1(5594.49,4295.28)
  Bottom Layer w5: v1(5594.49,4295.28) 5625.99,4326.77 HDR2.67@5625.99,4381.89
IO31: HDR2.69 U1.M5 | length 2233.4
  Top Layer w5: v1(4460.63,5381.89) U1.M5@4480.32,5401.58
  MidLayer2 w5: v1(4460.63,5381.89) 4440.95,5362.21 4370.08,5362.21 4338.27,5330.39 4338.27,5125.67 4299.21,5086.61 4299.21,4960.63 4582.68,4677.17 5307.09,4677.17 v1(5657.48,4326.77)
  Bottom Layer w5: v1(5657.48,4326.77) HDR2.69@5657.48,4381.89
IO32: HDR2.71 U1.L5 | length 2349.4
  Top Layer w5: v1(4460.63,5421.26) U1.L5@4480.32,5440.95
  MidLayer2 w5: v1(4460.63,5421.26) 4440.95,5401.58 4370.08,5401.58 4328.27,5359.76 4328.27,5139.29 4287.4,5098.43 4287.4,4956.69 4578.74,4665.35 5287.4,4665.35 v1(5657.48,4295.28)
  Bottom Layer w5: v1(5657.48,4295.28) 5688.98,4326.77 HDR2.71@5688.98,4381.89
IO33: HDR2.73 U1.P5 | length 2179.6
  Top Layer w5: v1(4460.63,5303.15) U1.P5@4480.32,5322.84
  MidLayer2 w5: v1(4460.63,5303.15) 4440.95,5283.47 4370.08,5283.47 4358.27,5271.65 4358.27,5098.43 4322.84,5062.99 4322.84,4968.5 4523.62,4767.72 5279.53,4767.72 v1(5720.47,4326.77)
  Bottom Layer w5: v1(5720.47,4326.77) HDR2.73@5720.48,4381.89
IO34: HDR2.75 U1.N5 | length 2295.6
  Top Layer w5: v1(4460.63,5342.52) U1.N5@4480.32,5362.21
  MidLayer2 w5: v1(4460.63,5342.52) 4440.95,5322.84 4370.08,5322.84 4348.27,5301.02 4348.27,5112.05 4311.02,5074.8 4311.02,4964.57 4519.69,4755.91 5259.84,4755.91 v1(5720.47,4295.28)
  Bottom Layer w5: v1(5720.47,4295.28) 5751.97,4326.77 HDR2.75@5751.97,4381.89
IO35: HDR2.77 U1.J6 | length 2231.3
  Top Layer w5: v1(4500,5500) U1.J6@4519.69,5519.69
  MidLayer2 w5: v1(4500,5500) 4519.69,5480.32 4519.69,5192.91 4440.95,5114.17 4440.95,5023.62 4669.29,4795.28 5303.15,4795.28 5744.1,4354.33 5755.91,4354.33 v1(5783.47,4326.77)
  Bottom Layer w5: v1(5783.47,4326.77) HDR2.77@5783.47,4381.89
JIOA0: HDR1.3 U1.D9 | length 689.8
  Top Layer w5: v1(4618.11,5736.22) U1.D9@4637.8,5716.54
  Bottom Layer w5: v1(4618.11,5736.22) 4598.43,5755.91 4598.43,6279.53 4618.11,6299.21 HDR1.3@4618.11,6381.89
JIOA1: HDR1.5 U1.D10 | length 710.9
  Top Layer w5: v1(4657.48,5736.22) U1.D10@4677.17,5716.54
  Bottom Layer w5: HDR1.5@4649.61,6381.89 4649.61,6314.96 4608.43,6273.78 4608.43,5860.08 4637.8,5830.71 4637.8,5755.91 v1(4657.48,5736.22)
JIOA2: HDR1.7 U1.C10 | length 676.3
  Top Layer w5: v1(4657.48,5775.59) U1.C10@4677.17,5755.91
  Bottom Layer w5: v1(4657.48,5775.59) 4657.48,5834.65 4618.43,5873.7 4618.43,6268.03 4681.1,6330.71 HDR1.7@4681.1,6381.89
JIOA3: HDR1.9 U1.D11 | length 736.7
  Top Layer w5: v1(4696.85,5736.22) U1.D11@4716.54,5716.54
  Bottom Layer w5: v1(4696.85,5736.22) 4677.17,5755.91 4677.17,5834.65 4628.43,5883.39 4628.43,6254.41 4712.6,6338.58 HDR1.9@4712.6,6381.89
JIOB0: HDR1.83 U1.J18 | length 1342.1
  Top Layer w5: U1.J18@4992.13,5519.69 v1(5011.81,5539.37)
  MidLayer2 w5: v1(5011.81,5539.37) 5031.5,5559.06 5145.67,5559.06 5271.65,5685.04 5271.65,5783.47 5744.1,6255.91 v1(5744.1,6283.47)
  Bottom Layer w5: v1(5744.1,6283.47) 5757.62,6296.99 5836.36,6296.99 5877.95,6338.58 HDR1.83@5877.95,6381.89
JIOB1: HDR1.85 U1.K18 | length 1373.8
  Top Layer w5: U1.K18@4992.13,5480.32 v1(5011.81,5500)
  MidLayer2 w5: v1(5011.81,5500) 5031.5,5519.69 5122.05,5519.69 5287.4,5685.04 5287.4,5783.47 5696.85,6192.91 5704.73,6192.91 v1(5775.59,6263.78)
  Bottom Layer w5: v1(5775.59,6263.78) 5834.65,6263.78 5909.45,6338.58 HDR1.85@5909.45,6381.89
JIOB2: HDR1.87 U1.E19 | length 1365.3
  Top Layer w5: U1.E19@5031.5,5677.17 v1(5051.18,5696.85)
  Bottom Layer w5: v1(5051.18,5696.85) 5070.87,5677.17 5110.24,5677.17 5114.17,5681.1 5322.84,5681.1 5413.39,5771.65 5413.39,5980.32 5657.48,6224.41 5826.77,6224.41 5940.95,6338.58 HDR1.87@5940.95,6381.89
JIOB3: HDR1.89 U1.F20 | length 1359.7
  Top Layer w5: U1.F20@5070.87,5637.8 v1(5090.55,5657.48)
  Bottom Layer w5: v1(5090.55,5657.48) 5129.92,5657.48 5141.73,5669.29 5330.71,5669.29 5425.2,5763.78 5425.2,5976.38 5661.42,6212.6 5846.46,6212.6 5972.44,6338.58 HDR1.89@5972.44,6381.89
KBCLOCK: HDR1.22 U1.D3 | length 1728.6
  Top Layer w5: v1(4381.89,5696.85) U1.D3@4401.58,5716.54
  Bottom Layer w5: v1(4381.89,5696.85) 4275.59,5803.15 4275.59,6171.62 4452.62,6348.65 4452.62,6715.61 4528.62,6791.61 4802.88,6791.61 4901.57,6692.91 HDR1.22@4901.57,6649.61
KBDATA: HDR1.24 U1.E4 | length 1858.8
  Top Layer w5: v1(4421.26,5657.48) U1.E4@4440.95,5677.17
  Bottom Layer w5: v1(4421.26,5657.48) 4401.58,5677.17 4374.02,5677.17 4263.78,5787.4 4263.78,6201.51 4442.62,6380.35 4442.62,6720.61 4523.62,6801.61 4824.38,6801.61 4933.07,6692.91 HDR1.24@4933.07,6649.61
LCD_BCKL: HDR2.22 U1.W13 | length 529.6
  Top Layer w5: U1.W13@4795.28,5125.98 v1(4814.96,5106.3)
  Bottom Layer w5: v1(4814.96,5106.3) 4834.65,5086.61 4834.65,5023.62 4846.46,5011.81 4862.21,5011.81 4885.51,4988.5 4885.51,4708.98 4901.58,4692.91 HDR2.22@4901.58,4649.61
LCD_E: HDR2.26 U1.W15 | length 520.4
  Top Layer w5: U1.W15@4874.02,5125.98 v1(4893.7,5106.3)
  Bottom Layer w5: v1(4893.7,5106.3) 4913.39,5086.61 4913.39,5019.69 4905.51,5011.81 4905.51,4751.97 4964.57,4692.91 HDR2.26@4964.57,4649.61
LED0: HDR2.60 U1.R19 | length 911.1
  Top Layer w5: U1.R19@5031.5,5283.47 v1(5051.18,5303.15)
  Bottom Layer w5: v1(5051.18,5303.15) 5070.87,5283.47 5145.67,5283.47 5236.85,5192.28 5236.85,4952.13 5500,4688.98 HDR2.60@5500,4649.61
LED1: HDR2.62 U1.P19 | length 971.4
  Top Layer w5: U1.P19@5031.5,5322.84 v1(5051.18,5342.52)
  Bottom Layer w5: v1(5051.18,5342.52) 5070.87,5322.84 5137.8,5322.84 5246.85,5213.78 5246.85,4956.27 5498.4,4704.72 5519.69,4704.72 5531.5,4692.91 HDR2.62@5531.5,4649.61
LED2: HDR2.64 U1.N19 | length 1036.3
  Top Layer w5: U1.N19@5031.5,5362.21 v1(5051.18,5381.89)
  Bottom Layer w5: v1(5051.18,5381.89) 5070.87,5362.21 5141.73,5362.21 5256.85,5247.09 5256.85,4960.41 5500.73,4716.54 5539.37,4716.54 5562.99,4692.91 HDR2.64@5562.99,4649.61
LED3: HDR2.66 U1.N20 | length 996.5
  Top Layer w5: U1.N20@5070.87,5362.21 v1(5090.55,5381.89)
  Bottom Layer w5: v1(5090.55,5381.89) 5137.8,5381.89 5266.85,5252.84 5266.85,5020.55 5594.49,4692.91 HDR2.66@5594.49,4649.61
LED4: HDR2.68 U1.M19 | length 1084.6
  Top Layer w5: U1.M19@5031.5,5401.58 v1(5051.18,5421.26)
  Bottom Layer w5: v1(5051.18,5421.26) 5070.87,5401.58 5133.86,5401.58 5276.85,5258.58 5276.85,5024.69 5596.82,4704.72 5614.18,4704.72 5625.99,4692.91 HDR2.68@5625.99,4649.61
LED5: HDR2.70 U1.M20 | length 1077.7
  Top Layer w5: U1.M20@5070.87,5401.58 v1(5090.55,5421.26)
  Bottom Layer w5: v1(5090.55,5421.26) 5129.92,5421.26 5286.85,5264.33 5286.85,5028.84 5599.15,4716.54 5633.86,4716.54 5657.48,4692.91 HDR2.70@5657.48,4649.61
LED6: HDR2.72 U1.L19 | length 1165.8
  Top Layer w5: U1.L19@5031.5,5440.95 v1(5051.18,5460.63)
  Bottom Layer w5: v1(5051.18,5460.63) 5070.87,5440.95 5125.99,5440.95 5296.85,5270.08 5296.85,5032.98 5601.48,4728.35 5653.55,4728.35 5688.98,4692.91 HDR2.72@5688.98,4649.61
LED7: HDR2.74 U1.L20 | length 1158.9
  Top Layer w5: U1.L20@5070.87,5440.95 v1(5090.55,5460.63)
  Bottom Layer w5: v1(5090.55,5460.63) 5122.05,5460.63 5306.85,5275.83 5306.85,5037.12 5603.81,4740.16 5673.23,4740.16 5720.48,4692.91 HDR2.74@5720.48,4649.61
MOUSECLOCK: HDR1.26 U1.E3 | length 1988.9
  Top Layer w5: v1(4381.89,5657.48) U1.E3@4401.58,5677.17
  Bottom Layer w5: v1(4381.89,5657.48) 4374.02,5657.48 4251.97,5779.53 4251.97,6393.7 4199.62,6446.06 4199.62,6588.61 4422.62,6811.61 4845.87,6811.61 4964.57,6692.91 HDR1.26@4964.57,6649.61
MOUSEDATA: HDR1.28 U1.F4 | length 2113.8
  Top Layer w5: v1(4421.26,5618.11) U1.F4@4440.95,5637.8
  Bottom Layer w5: v1(4421.26,5618.11) 4401.58,5637.8 4374.02,5637.8 4241.97,5769.84 4241.97,6387.95 4189.62,6440.31 4189.62,6593.61 4418.62,6822.61 4866.37,6822.61 4996.06,6692.91 HDR1.28@4996.06,6649.61
NBLE0: U1.H22 U5.37 | length 618
  Top Layer w5: U1.H22@5149.61,5559.06 5181.1,5559.06 5206.22,5584.17 5685.66,5584.17 5707.78,5606.3 U5.37@5748.03,5606.3
NBLE1: U1.H21 U5.36 | length 663.9
  Top Layer w5: U1.H21@5110.24,5559.06 5129.92,5578.74 5177.17,5578.74 5192.6,5594.17 5681.51,5594.17 5709.39,5622.05 U5.36@5748.03,5622.05
NBLE2: U1.G22 U5.35 | length 614.7
  Top Layer w5: U1.G22@5149.61,5598.43 5173.23,5598.43 5178.98,5604.17 5677.37,5604.17 5710.99,5637.8 U5.35@5748.03,5637.8
NBLE3: U1.G21 U5.34 | length 660.6
  Top Layer w5: U1.G21@5110.24,5598.43 5129.92,5618.11 5677.17,5618.11 5712.6,5653.54 U5.34@5748.03,5653.54
NCS0: U1.L21 U5.48 | length 830.2
  Top Layer w5: U1.L21@5110.24,5440.95 5129.92,5460.63 5767.72,5460.63 5791.34,5484.25 5842.52,5484.25 5874.02,5452.76 U5.48@5874.02,5417.32
NCS1: U1.L22 U5.47 | length 765.3
  Top Layer w5: U1.L22@5149.61,5440.95 5763.78,5440.95 5795.28,5472.44 5838.58,5472.44 5858.27,5452.76 U5.47@5858.27,5417.32
NCS2: U1.M21 U5.46 | length 795.4
  Top Layer w5: U1.M21@5110.24,5401.58 5129.92,5421.26 5177.17,5421.26 5185.04,5429.13 5767.72,5429.13 5799.21,5460.63 5834.65,5460.63 5842.52,5452.76 U5.46@5842.52,5417.32
NCS3: U1.K22 U5.44 | length 604.9
  Top Layer w5: U1.K22@5149.61,5480.32 5685.04,5480.32 5700.79,5496.06 U5.44@5748.03,5496.06
NCS4: U1.K21 U5.43 | length 650.8
  Top Layer w5: U1.K21@5110.24,5480.32 5129.92,5500 5679.5,5500 5691.31,5511.81 U5.43@5748.03,5511.81
NCS5: U1.J22 U5.42 | length 608.2
  Top Layer w5: U1.J22@5149.61,5519.69 5181.1,5519.69 5188.98,5511.81 5669.29,5511.81 5685.04,5527.56 U5.42@5748.03,5527.56
NDACK0: U1.N18 U5.147 | length 1786.3
  Top Layer w5: U1.N18@4992.13,5362.21 v1(5011.81,5381.89) ; v2(6267.72,6173.23) 6283.47,6188.98 U5.147@6283.47,6251.97
  MidLayer2 w5: v1(5011.81,5381.89) 5031.5,5401.58 5122.05,5401.58 5338.58,5618.11 5338.58,5770.93 5703.64,6135.98 6230.47,6135.98 v2(6267.72,6173.23)
NetC59_1: C59.1 R36.1 R37.2 | length 448
  Bottom Layer w5: R36.1@5988.19,5590.55 6003.94,5590.55 6044.71,5631.33 6044.71,5637.23 R37.2@6057.09,5649.61 6096.46,5610.24 6311.03,5610.24 6354.33,5566.93 C59.1@6374.02,5566.93
NetC60_1: C60.1 R44.1 R46.2 | length 458.3
  Bottom Layer w5: R44.1@5988.19,5543.31 6057.09,5543.31 R46.2@6066.93,5543.31 ; R46.2@6053.15,5559.06 6055.12,5561.02 6094.33,5600.24 6301.34,5600.24 6342.52,5559.06 6342.52,5539.37 6354.33,5527.56 C60.1@6374.02,5527.56
NetC61_1: C61.1 C63.1 C64.1 C65.1 D1.3 R59.2 U5.91 | length 864.6
  Top Layer w5: U5.91@6582.68,5527.56 6618.11,5527.56 6629.92,5515.75 v1(6645.67,5515.75)
  Bottom Layer w7.87: R59.2@6135.83,5897.64 6147.64,5885.83 D1.3@6147.64,5771.65 D1.3@6147.64,5769.69 ; D1.3@6146.65,5770.67 D1.3@6147.64,5769.69 ; C61.1@6641.73,5543.31 6645.67,5539.37 v1(6645.67,5515.75) ; C63.1@6645.67,5484.25 6645.67,5488.19 v1(6645.67,5515.75) ; D1.3@6147.64,5769.69 C65.1@6244.1,5673.23 C64.1@6393.7,5673.23 6480.32,5673.23 6629.92,5523.62 v1(6645.67,5515.75)
NetC61_2: C61.2 C63.2 C64.2 C65.2 U5.92 | length 706.5
  Top Layer w5: U5.92@6582.68,5543.31 6625.98,5543.31 6633.86,5535.43 6661.42,5535.43 v1(6681.1,5515.75)
  Bottom Layer w7.87: C65.2@6267.72,5791.34 C64.2@6393.7,5791.34 6405.51,5791.34 6429.14,5767.72 6429.14,5744.1 6574.8,5598.43 6645.67,5598.43 6681.1,5562.99 C61.2@6681.1,5543.31 v1(6681.1,5515.75) C63.2@6681.1,5488.19
NetLED1_1: LED1.1 R5.2 | length 333.5
  Top Layer w7.87: LED1.1@5911.42,4216.54 5911.42,4167.32 5944.88,4133.86 6027.56,4133.86 6110.24,4216.54 R5.2@6147.64,4216.54
NetLED2_1: LED2.1 R16.1 | length 215.7
  Top Layer w7.87: R16.1@4537.4,4271.65 4610.24,4271.65 4665.36,4216.54 LED2.1@4730.32,4216.54
NetLED2_2: LED2.2 U2.4 | length 703.1
  Top Layer w7.87: U2.4@4159.45,4227.36 4209.65,4227.36 4287.4,4149.61 4759.84,4149.61 4787.4,4177.17 LED2.2@4787.4,4208.66
NetLED3_1: LED3.1 R58.2 | length 681.6
  Top Layer w7.87: R58.2@5937.01,7011.81 R58.2@5942.91,7011.81 v1(5944.88,7059.06) ; v1(6444.88,7259.84) LED3.1@6490.16,7259.84
  MidLayer3 w5: v1(5944.88,7059.06) 6118.11,7232.28 6417.32,7232.28 v1(6444.88,7259.84)
NetP1_1: P1.1 R58.1 R60.1 U6.1 | length 1489.4
  Top Layer w5: v1(5822.84,7011.81) 5866.14,7011.81 R58.1@5867.13,7010.83 ; U6.1@6145.67,6801.18 v1(6145.67,6850.39)
  MidLayer1 w5: v1(5822.84,7011.81) 5984.25,7011.81 v1(6145.67,6850.39)
  MidLayer2 w5: P1.1@5125.99,7625.98 5437.01,7314.96 5527.56,7314.96 5692.91,7149.61 5724.41,7149.61 5822.84,7051.18 v1(5822.84,7011.81)
  Bottom Layer w5: R60.1@6145.67,6818.9 v1(6145.67,6850.39)
NetP2_17: P2.17 R66.2 | length 774.4
  MidLayer2 w5: P2.17@5642.13,7624.8 5688.98,7577.95 5688.98,7480.32 v1(6098.43,7070.87)
  Bottom Layer w5: R66.2@6098.43,7039.37 v1(6098.43,7070.87)
NetP2_19: P2.19 R67.2 | length 819.4
  MidLayer2 w5: P2.19@5542.13,7624.8 5590.55,7576.38 5590.55,7492.13 6011.81,7070.87 v1(6051.18,7070.87)
  Bottom Layer w5: R67.2@6051.18,7039.37 v1(6051.18,7070.87)
NetR21_1: R21.1 U5.104 | length 84.6
  Top Layer w5: v2(6535.43,5732.28) U5.104@6582.68,5732.28
  Bottom Layer w5: v2(6535.43,5732.28) 6559.06,5755.91 R21.1@6562.99,5755.91
NetR22_1: R22.1 U5.99 | length 303.9
  Top Layer w5: v2(6472.44,5767.72) 6500,5740.16 6500,5681.1 6527.56,5653.54 U5.99@6582.68,5653.54
  Bottom Layer w5: v2(6472.44,5767.72) 6523.62,5716.54 R22.1@6562.99,5716.54
NetR23_1: R23.1 U5.98 | length 310.1
  Top Layer w5: v2(6472.44,5744.1) 6472.44,5688.98 6523.62,5637.8 U5.98@6582.68,5637.8
  Bottom Layer w5: v2(6472.44,5744.1) 6507.88,5708.66 6507.88,5700.79 6523.62,5685.04 6562.99,5685.04 R23.1@6566.93,5685.04
NetR25_1: R25.1 U5.127 | length 83.6
  Top Layer w5: v2(6535.43,6094.49) U5.127@6582.68,6094.49
  Bottom Layer w5: v2(6535.43,6094.49) 6547.25,6106.3 6562.99,6106.3 R25.1@6566.93,6106.3
NetR26_1: R26.1 U5.126 | length 154.1
  Top Layer w5: v2(6503.94,6094.49) 6519.69,6078.74 U5.126@6582.68,6078.74
  Bottom Layer w5: v2(6503.94,6094.49) 6527.56,6070.87 R26.1@6562.99,6070.87
NetR27_1: R27.1 U5.124 | length 92.5
  Top Layer w5: v2(6535.43,6055.12) 6543.31,6047.24 U5.124@6582.68,6047.24
  Bottom Layer w5: v2(6535.43,6055.12) 6551.18,6039.37 6562.99,6039.37 R27.1@6570.87,6039.37
NetR28_1: R28.1 U5.123 | length 98
  Top Layer w5: v2(6535.43,6031.5) U5.123@6582.68,6031.5
  Bottom Layer w5: v2(6535.43,6031.5) 6535.43,6019.69 R28.1@6562.99,5992.13
NetR29_1: R29.1 U5.122 | length 432.3
  Top Layer w5: v2(6488.19,6000) 6503.94,6015.75 U5.122@6582.68,6015.75
  Bottom Layer w5: R29.1@6263.78,5870.08 6318.9,5870.08 6338.58,5889.76 6456.69,5889.76 6460.63,5893.7 6460.63,5984.25 6476.38,6000 v2(6488.19,6000)
NetR30_1: R30.1 U5.121 | length 276.1
  Top Layer w5: v2(6519.69,6000) U5.121@6582.68,6000
  Bottom Layer w5: R30.1@6413.39,5870.08 6456.69,5870.08 6472.44,5885.83 6472.44,5976.38 6480.32,5984.25 6503.94,5984.25 v2(6519.69,6000)
NetR31_1: R31.1 U5.119 | length 112.8
  Top Layer w5: v2(6519.69,5968.5) U5.119@6582.68,5968.5
  Bottom Layer w5: v2(6519.69,5968.5) 6547.25,5968.5 R31.1@6562.99,5952.76
NetR32_1: R32.1 U5.118 | length 197.7
  Top Layer w5: v2(6488.19,5968.5) 6503.94,5952.76 U5.118@6582.68,5952.76
  Bottom Layer w5: v2(6488.19,5968.5) 6503.94,5952.76 6527.56,5952.76 6555.12,5925.2 R32.1@6555.12,5913.39
NetR33_1: R33.1 U5.117 | length 193.1
  Top Layer w5: v2(6519.69,5937.01) U5.117@6582.68,5937.01
  Bottom Layer w5: v2(6519.69,5937.01) 6503.94,5921.26 6503.94,5897.64 6555.12,5846.46 R33.1@6555.12,5834.65
NetR34_1: R34.1 U5.116 | length 299.1
  Top Layer w5: v2(6488.19,5937.01) 6503.94,5921.26 U5.116@6582.68,5921.26
  Bottom Layer w5: v2(6488.19,5937.01) 6488.19,5830.71 6519.69,5799.21 6562.99,5799.21 R34.1@6566.93,5799.21
NetR35_1: R35.1 U5.115 | length 125.6
  Top Layer w5: v2(6519.69,5905.51) U5.115@6582.68,5905.51
  Bottom Layer w5: v2(6519.69,5905.51) 6547.25,5877.95 6562.99,5877.95 R35.1@6570.87,5877.95
NetR39_1: R39.1 U5.129 | length 80.6
  Top Layer w5: v2(6535.43,6125.98) U5.129@6582.68,6125.98
  Bottom Layer w5: v2(6535.43,6125.98) R39.1@6559.06,6149.61
NetR40_1: R40.1 U5.131 | length 138.8
  Top Layer w5: U5.131@6582.68,6157.48 v2(6629.92,6157.48)
  Bottom Layer w5: R40.1@6602.36,6228.35 6618.11,6228.35 6629.92,6216.54 v2(6629.92,6157.48)
NetR41_1: R41.1 U5.133 | length 154.1
  Top Layer w5: v2(6488.19,6173.23) 6503.94,6188.98 U5.133@6503.94,6251.97
  Bottom Layer w5: v2(6488.19,6173.23) 6511.81,6196.85 R41.1@6511.81,6232.28
NetR42_1: R42.1 U5.134 | length 78.1
  Top Layer w5: v2(6488.19,6204.72) U5.134@6488.19,6251.97
  Bottom Layer w5: R42.1@6480.32,6232.28 6480.32,6212.6 v2(6488.19,6204.72)
NetR43_1: R43.1 U5.135 | length 98.7
  Top Layer w5: v2(6452.76,6204.72) 6464.57,6204.72 6472.44,6212.6 U5.135@6472.44,6251.97
  Bottom Layer w5: R43.1@6440.95,6236.22 6440.95,6232.28 6440.95,6216.54 v2(6452.76,6204.72)
NetR45_1: R45.1 U5.137 | length 93.4
  Top Layer w5: v2(6425.2,6204.72) 6440.95,6220.47 U5.137@6440.95,6251.97
  Bottom Layer w5: R45.1@6393.7,6224.41 6405.51,6224.41 v2(6425.2,6204.72)
NetR48_1: R48.1 U5.130 | length 181.9
  Top Layer w5: v2(6503.94,6125.98) 6519.69,6141.73 U5.130@6582.68,6141.73
  Bottom Layer w5: v2(6503.94,6125.98) 6503.94,6145.67 6547.25,6188.98 R48.1@6562.99,6188.98
NetR49_1: R49.1 U5.132 | length 234.8
  Top Layer w5: U5.132@6582.68,6173.23 6649.61,6173.23 v2(6665.36,6157.48)
  Bottom Layer w5: R49.1@6602.36,6267.72 6618.11,6267.72 6665.36,6220.47 v2(6665.36,6157.48)
NetR50_1: R50.1 U5.139 | length 189.8
  Top Layer w5: v2(6393.7,6173.23) 6409.45,6188.98 U5.139@6409.45,6251.97
  Bottom Layer w5: R50.1@6318.9,6228.35 6318.9,6216.54 6330.71,6204.72 6362.21,6204.72 v2(6393.7,6173.23)
NetR51_1: R51.1 U5.140 | length 96.4
  Top Layer w5: v2(6393.7,6204.72) U5.140@6393.7,6251.97
  Bottom Layer w5: R51.1@6354.33,6228.35 6369.71,6212.97 6385.45,6212.97 v2(6393.7,6204.72)
NetR52_1: R52.1 U5.141 | length 281
  Top Layer w5: v2(6346.46,6157.48) 6377.95,6188.98 U5.141@6377.95,6251.97
  Bottom Layer w5: R52.1@6236.22,6232.28 6236.22,6177.17 6255.91,6157.48 v2(6346.46,6157.48)
NetR53_1: R53.1 U5.142 | length 168.9
  Top Layer w5: v2(6346.46,6188.98) 6362.21,6204.72 U5.142@6362.21,6251.97
  Bottom Layer w5: R53.1@6279.53,6228.35 6279.53,6216.54 6283.47,6212.6 6283.47,6196.85 6291.34,6188.98 v2(6346.46,6188.98)
NetR54_1: R54.1 U5.159 | length 181.3
  Top Layer w5: v2(6090.55,6177.17) 6106.3,6192.91 6106.3,6208.66 6094.49,6220.47 U5.159@6094.49,6251.97
  Bottom Layer w5: v2(6090.55,6177.17) 6114.17,6177.17 6153.54,6216.54 R54.1@6153.54,6232.28
NetR55_1: R55.1 U5.160 | length 90.2
  Top Layer w5: U5.160@6078.74,6251.97 6078.74,6212.6 v2(6090.55,6200.79)
  Bottom Layer w5: v2(6090.55,6200.79) 6106.3,6216.54 R55.1@6106.3,6228.35
NetR56_1: R56.1 U5.163 | length 102
  Top Layer w5: U5.163@6031.5,6251.97 v2(6031.5,6299.21)
  Bottom Layer w5: v2(6031.5,6299.21) 6059.06,6271.65 R56.1@6074.8,6271.65
NetR64_2: R64.2 R65.1 U10.4 | length 197.5
  Top Layer w7.87: v1(5771.65,4066.93) 5771.65,4122.05 5771.65,4198.82 R64.2@5773.62,4200.79
  Bottom Layer w7.87: v1(5771.65,4066.93) U10.4@5834.45,4066.93
NEXUS_TCK: HDR1.82 U1.F9 | length 1877.3
  Top Layer w5: v1(4618.11,5657.48) U1.F9@4637.8,5637.8
  MidLayer2 w5: v1(4618.11,5657.48) 4637.8,5677.17 4637.8,5787.4 4708.66,5858.27 4708.66,5929.13 5200.79,6421.26 5500,6421.26 v1(5814.96,6736.22)
  Bottom Layer w5: v1(5814.96,6736.22) 5834.65,6716.54 5834.65,6704.72 5846.46,6692.91 HDR1.82@5846.46,6649.61
NEXUS_TDI: HDR1.84 U1.G6 | length 2132.4
  Top Layer w5: v1(4500,5578.74) U1.G6@4519.69,5598.43
  MidLayer2 w5: v1(4500,5578.74) 4519.69,5598.43 4519.69,5637.8 4480.32,5677.17 4480.32,5787.4 4661.42,5968.5 4724.41,5968.5 5192.91,6437.01 5452.76,6437.01 5783.47,6767.72 v1(5814.96,6767.72)
  Bottom Layer w5: v1(5814.96,6767.72) 5846.46,6736.22 5846.46,6716.54 5874.02,6688.98 HDR1.84@5874.02,6661.42
NEXUS_TDO: HDR1.76 R2.1 | length 896.6
  Top Layer w5: R2.1@5133.86,6232.28 5133.86,6244.1 v1(5149.61,6259.84)
  MidLayer3 w5: v1(5149.61,6259.84) 5149.61,6295.28 5464.57,6610.24 5657.48,6610.24 v1(5751.97,6704.72)
  Bottom Layer w5: HDR1.76@5751.97,6649.61 v1(5751.97,6704.72)
NEXUS_TDO_R: R2.2 U1.E18 | length 656.7
  Top Layer w5: v1(4972.44,5696.85) U1.E18@4992.13,5677.17 ; v1(5149.61,6165.35) 5165.36,6181.1 R2.2@5165.36,6196.85
  MidLayer2 w5: v1(4972.44,5696.85) 4992.13,5716.54 4992.13,5791.34 4933.07,5850.39 4933.07,5905.51 5149.61,6122.05 v1(5149.61,6165.35)